# Altium PCB MainDone1.PcbDoc
Units mm, origin at the board's own origin, x right, y up, seen from the top; angles counter-clockwise.
Board outline 144.45 x 98.58 mm, 2 copper layers (Top Layer, Bottom Layer); 13 components, 21 nets, 218 pads, 0 vias.
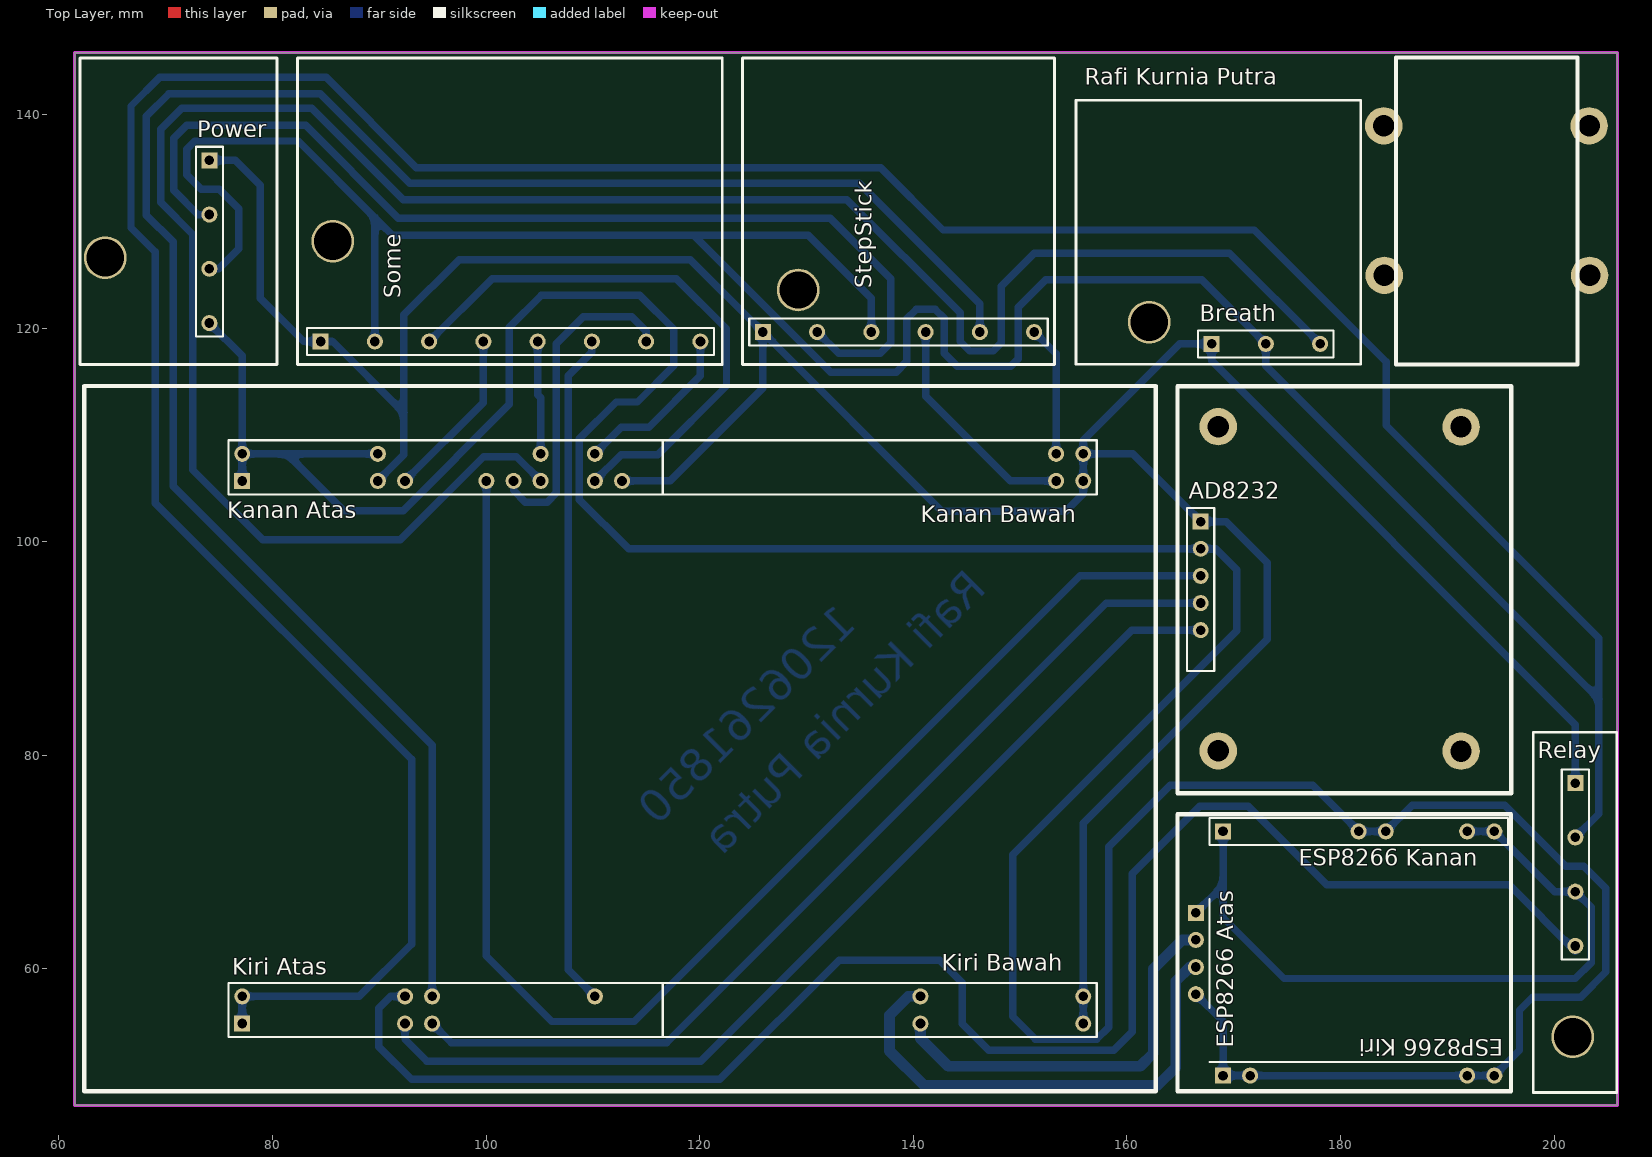
[diagram p0: Top Layer view]
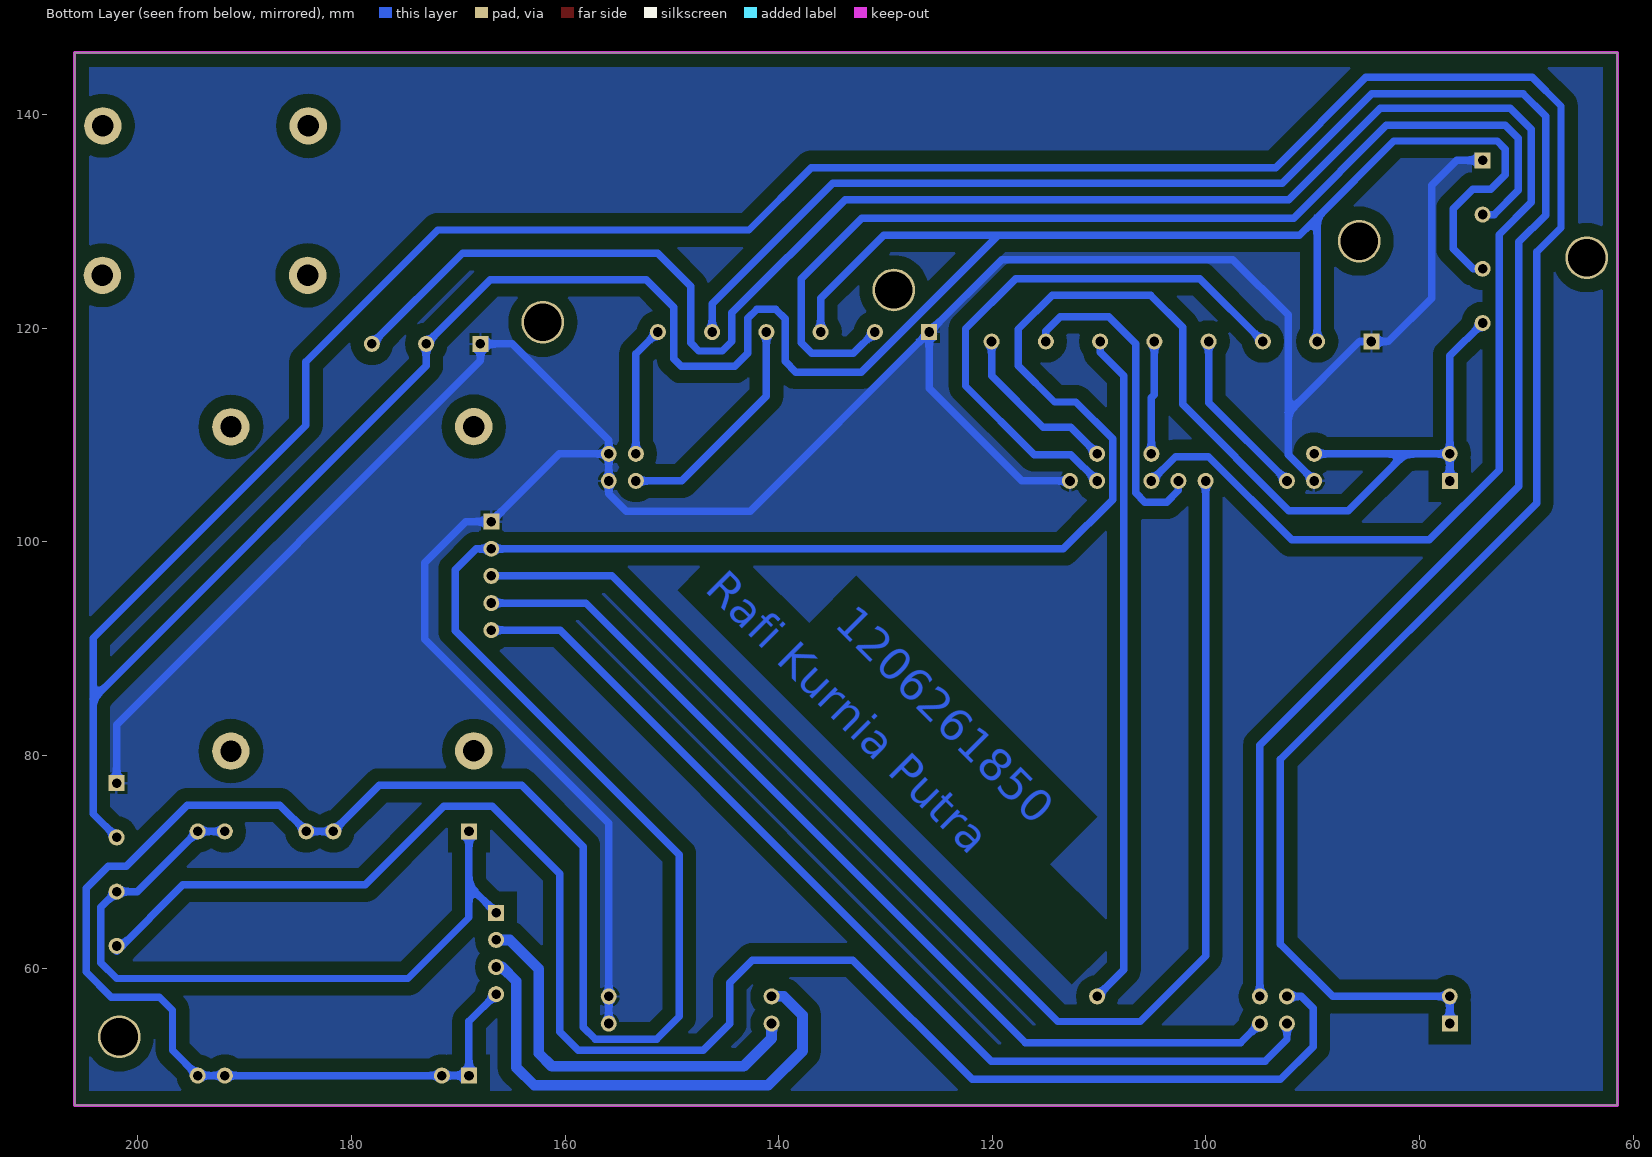
[diagram p1: Bottom Layer view, seen from below]

## Layer stack, top to bottom
Top Solder: solder mask 0.0102, Solder Resist, Dk 3.5
Top Layer: signal copper 0.0356
Dielectric 1: dielectric 0.32, FR-4, Dk 4.8
Bottom Layer: signal copper 0.0356
Bottom Solder: solder mask 0.0102, Solder Resist, Dk 3.5

## Board outline
61.468,47.219 61.468,145.796 205.918,145.796 205.918,47.219

## Design rules (kind name [scope] priority, off if disabled: settings)
Clearance [All] p1: gap=0.35
PolygonConnect [All] p1: connectstyle=Relief reliefconductorwidth=0.254 reliefentries=4 polygonreliefangle="90 Angle" airgapwidth=0.254
RoutingVias [All] p1: holewidth=0.711 width=1.27 viastyle="Through Hole" minholewidth=0.711 minwidth=1.27 maxholewidth=0.711 maxwidth=1.27
SolderMaskExpansion [All] p1: expansion=0.102
Width Width_1 [All] p1: maxlimit=2 minlimit=0.7 preferedwidth=0.7
30 further rules are at their usual default settings.

## Components (designator, comment, footprint, x,y, rotation, side; value= is the part's Value field where it differs from the comment)
AD8232 "" HDR1X6 166.903,101.879 r270 top
Breath "Header 5" HDR1X5 167.919,118.516 r0 top
"ESP8266 Atas" "" HDR1X4 166.451,65.258 r270 top
"ESP8266 Kanan" "" HDR1X11#1 168.991,72.878 r0 top
"ESP8266 Kiri" "" HDR1X11#2 168.991,50.018 r0 top
"Kanan Atas" "" HDR2X16#1 77.165,105.689 r0 top
"Kanan Bawah" "" HDR2X16#2 117.805,105.689 r0 top
"Kiri Atas" "" HDR2X16#3 77.165,54.889 r0 top
"Kiri Bawah" "" HDR2X16#4 117.805,54.889 r0 top
Power "Header 7" HDR1X7 74.092,135.712 r270 top
Relay "Header 7" HDR1X7 201.981,77.394 r270 top
Some "Header 15" HDR1X15 84.506,118.745 r0 top
StepStick "Header 11" HDR1X11#3 125.908,119.634 r0 top

## Footprints (in the part's own frame and the unit in brackets; to place one, negate y for a bottom-side part, rotate by r counter-clockwise, add the part's x,y. Pads: shape width x height; smd on the part's side, far side on the other; paste and mask are expansions set on the pad)
HDR1X4 [mm] "Connector; Header; 4 Position"
  rect 1.5x1.5 hole 0.9: 1(0,0)
  round 1.5 hole 0.9: 2(2.54,0) 3(5.08,0) 4(7.62,0)
  silkscreen extent -1.27,1.27 8.89,1.27
HDR1X5 [mm] "Connector; Header; 5 Position"
  rect 1.5x1.5 hole 0.9: 1(0,0)
  round 0 all layers, no hole: 2(2.54,0) 4(7.62,0)
  round 1.5 hole 0.9: 3(5.08,0) 5(10.16,0)
  silkscreen extent -1.27,-1.27 11.43,1.27
HDR1X6 [mm] "Connector; Header; 6 Position"
  rect 1.5x1.5 hole 0.9: 1(0,0)
  round 1.5 hole 0.9: 2(2.54,0) 3(5.08,0) 4(7.62,0) 5(10.16,0)
  round 0 all layers, no hole: 6(12.7,0)
  silkscreen extent -1.27,-1.27 13.97,1.27
HDR1X7 [mm] "Connector; Header; 7 Position"
  rect 1.5x1.5 hole 0.9: 1(0,0)
  round 0 all layers, no hole: 2(2.54,0) 4(7.62,0) 6(12.7,0)
  round 1.5 hole 0.9: 3(5.08,0) 5(10.16,0) 7(15.24,0)
  silkscreen extent -1.27,-1.27 16.51,1.27
HDR1X11#1 [mm] "Connector; Header; 11 Position"
  rect 1.5x1.5 hole 0.9: 1(0,0)
  round 0 all layers, no hole: 2(2.54,0) 3(5.08,0) 4(7.62,0) 5(10.16,0) 8(17.78,0) 9(20.32,0)
  round 1.5 hole 0.9: 6(12.7,0) 7(15.24,0) 10(22.86,0) 11(25.4,0)
  silkscreen extent -1.27,-1.27 26.67,1.27
HDR1X11#2 [mm] "Connector; Header; 11 Position"
  rect 1.5x1.5 hole 0.9: 1(0,0)
  round 1.5 hole 0.9: 2(2.54,0) 10(22.86,0) 11(25.4,0)
  round 0 all layers, no hole: 3(5.08,0) 4(7.62,0) 5(10.16,0) 6(12.7,0) 7(15.24,0) 8(17.78,0) 9(20.32,0)
  silkscreen extent -1.27,1.27 26.67,1.27
HDR1X11#3 [mm] "Connector; Header; 11 Position"
  rect 1.5x1.5 hole 0.9: 1(0,0)
  round 0 all layers, no hole: 2(2.54,0) 4(7.62,0) 6(12.7,0) 8(17.78,0) 10(22.86,0)
  round 1.5 hole 0.9: 3(5.08,0) 5(10.16,0) 7(15.24,0) 9(20.32,0) 11(25.4,0)
  silkscreen extent -1.27,-1.27 26.67,1.27
HDR1X15 [mm] "Connector; Header; 15 Position"
  rect 1.5x1.5 hole 0.9: 1(0,0)
  round 0 all layers, no hole: 2(2.54,0) 4(7.62,0) 6(12.7,0) 8(17.78,0) 10(22.86,0) 12(27.94,0) 14(33.02,0)
  round 1.5 hole 0.9: 3(5.08,0) 5(10.16,0) 7(15.24,0) 9(20.32,0) 11(25.4,0) 13(30.48,0) 15(35.56,0)
  silkscreen extent -1.27,-1.27 36.83,1.27
HDR2X16#1 [mm] "Connector; Header; 16x2 Position"
  rect 1.5x1.5 hole 0.9: 1(0,0)
  round 1.5 hole 0.9: 2(0,2.54) 11(12.7,0) 12(12.7,2.54) 13(15.24,0) 19(22.86,0) 21(25.4,0) 23(27.94,0) 24(27.94,2.54) 27(33.02,0) 28(33.02,2.54) 29(35.56,0)
  round 0 all layers, no hole: 3(2.54,0) 4(2.54,2.54) 5(5.08,0) 6(5.08,2.54) 7(7.62,0) 8(7.62,2.54) 9(10.16,0) 10(10.16,2.54) 14(15.24,2.54) 15(17.78,0) 16(17.78,2.54) 17(20.32,0) 18(20.32,2.54) 20(22.86,2.54) 22(25.4,2.54) 25(30.48,0) 26(30.48,2.54) 30(35.56,2.54) 31(38.1,0) 32(38.1,2.54)
  silkscreen extent -1.27,-1.27 39.37,3.81
HDR2X16#2 [mm] "Connector; Header; 16x2 Position"
  rect 0x0 all layers, no hole: 1(0,0)
  round 0 all layers, no hole: 2(0,2.54) 3(2.54,0) 4(2.54,2.54) 5(5.08,0) 6(5.08,2.54) 7(7.62,0) 8(7.62,2.54) 9(10.16,0) 10(10.16,2.54) 11(12.7,0) 12(12.7,2.54) 13(15.24,0) 14(15.24,2.54) 15(17.78,0) 16(17.78,2.54) 17(20.32,0) 18(20.32,2.54) 19(22.86,0) 20(22.86,2.54) 21(25.4,0) 22(25.4,2.54) 23(27.94,0) 24(27.94,2.54) 25(30.48,0) 26(30.48,2.54) 27(33.02,0) 28(33.02,2.54)
  round 1.5 hole 0.9: 29(35.56,0) 30(35.56,2.54) 31(38.1,0) 32(38.1,2.54)
  silkscreen extent -1.27,-1.27 39.37,3.81
HDR2X16#3 [mm] "Connector; Header; 16x2 Position"
  rect 1.5x1.5 hole 0.9: 1(0,0)
  round 1.5 hole 0.9: 2(0,2.54) 13(15.24,0) 14(15.24,2.54) 15(17.78,0) 16(17.78,2.54) 28(33.02,2.54)
  round 0 all layers, no hole: 3(2.54,0) 4(2.54,2.54) 5(5.08,0) 6(5.08,2.54) 7(7.62,0) 8(7.62,2.54) 9(10.16,0) 10(10.16,2.54) 11(12.7,0) 12(12.7,2.54) 17(20.32,0) 18(20.32,2.54) 19(22.86,0) 20(22.86,2.54) 21(25.4,0) 22(25.4,2.54) 23(27.94,0) 24(27.94,2.54) 25(30.48,0) 26(30.48,2.54) 27(33.02,0) 29(35.56,0) 30(35.56,2.54) 31(38.1,0) 32(38.1,2.54)
  silkscreen extent -1.27,-1.27 39.37,3.81
HDR2X16#4 [mm] "Connector; Header; 16x2 Position"
  rect 0x0 all layers, no hole: 1(0,0)
  round 0 all layers, no hole: 2(0,2.54) 3(2.54,0) 4(2.54,2.54) 5(5.08,0) 6(5.08,2.54) 7(7.62,0) 8(7.62,2.54) 9(10.16,0) 10(10.16,2.54) 11(12.7,0) 12(12.7,2.54) 13(15.24,0) 14(15.24,2.54) 15(17.78,0) 16(17.78,2.54) 17(20.32,0) 18(20.32,2.54) 21(25.4,0) 22(25.4,2.54) 23(27.94,0) 24(27.94,2.54) 25(30.48,0) 26(30.48,2.54) 27(33.02,0) 28(33.02,2.54) 29(35.56,0) 30(35.56,2.54)
  round 1.5 hole 0.9: 19(22.86,0) 20(22.86,2.54) 31(38.1,0) 32(38.1,2.54)
  silkscreen extent -1.27,-1.27 39.37,3.81

## Part data
AD8232: library part "Header 6", "Header, 6-Pin"
Breath: "Header, 5-Pin"
"ESP8266 Atas": library part "Header 4", "Header, 4-Pin"
"ESP8266 Kanan" "ESP8266 Kiri": library part "Header 11", "Header, 11-Pin"
"Kanan Atas" "Kanan Bawah" "Kiri Atas" "Kiri Bawah": library part "Header 16X2", "Header, 16-Pin, Dual row"
Power Relay: "Header, 7-Pin"
Some: "Header, 15-Pin"
StepStick: "Header, 11-Pin"

## Free pads (board coordinates)
  round 3.5 hole 2: 0(184.038,138.934) 1(203.263,138.935) 2(203.314,124.939) 3(184.089,124.939) 6(191.278,80.395) 7(168.545,80.42) 8(168.545,110.773) 9(191.278,110.748)
  round 4 hole 3.5: 8(64.338,126.594) 8(162.077,120.548) 10(85.649,128.143) 10(129.21,123.571) 10(201.727,53.645)

## Nets (pads, with @x,y where several pads share a name; then routed paths per layer and width w, separated by ;. In a path a pad name is that pad's centre, name@x,y a point inside that pad or via, vN(x,y) a via of type N, cw(c..) or ccw(c..) an arc to the next point about the centre after c; other vN are vias at no path point)
+3.3: "ESP8266 Atas.4" "ESP8266 Kanan.6" "ESP8266 Kanan.7" "ESP8266 Kiri.1" "ESP8266 Kiri.2" "ESP8266 Kiri.10" "ESP8266 Kiri.11" "Kanan Atas.1" "Kanan Atas.2" "Kanan Atas.12" AD8232.2 Power.7 | length 357.4
  Bottom Layer w0.7: Power.7 77.165,117.399 77.165,108.229 ; 77.165,105.689 77.165,108.229 ; 81.331,108.229 86.665,102.895 92.227,102.895 102.184,112.852 102.184,120.091 105.181,123.088 114.376,123.088 117.551,119.913 117.551,116.459 114.173,113.081 112.166,113.081 108.735,109.65 108.735,103.939 113.335,99.339 AD8232.2 168.326,99.339 170.282,97.384 170.282,91.669 149.301,70.688 149.301,55.55 151.412,53.439 157.173,53.439 158.293,54.559 158.293,71.45 164.033,77.191 177.378,77.191 181.691,72.878 184.231,72.878 186.69,75.336 195.351,75.336 201.092,69.596 202.768,69.596 204.826,67.539 204.826,59.715 202.463,57.353 197.968,57.353 196.748,56.134 196.748,52.375 194.391,50.018 191.851,50.018 171.531,50.018 168.991,50.018 168.991,55.098 166.451,57.638 ; 89.865,108.229 77.165,108.229
+5: "Kiri Atas.1" "Kiri Atas.2" Breath.3 Power.5 Relay.3 Some.3 StepStick.5 | length 516.8
  Bottom Layer w0.7: Power.5 74.955,125.552 76.835,127.432 76.835,131.166 75.006,132.994 73.33,132.994 71.958,134.366 71.958,136.754 72.72,137.516 82.419,137.516 89.586,130.349 ; 77.165,54.889 77.165,57.429 88.138,57.429 93.015,62.306 93.015,79.629 69.037,103.607 69.037,127.127 66.751,129.413 66.751,140.792 69.444,143.485 85.014,143.485 93.472,135.026 136.931,135.026 142.773,129.184 171.907,129.184 184.252,116.84 184.252,110.896 204.191,90.957 204.191,74.524 Relay.3 ; Some.3 89.586,130.349 ; 119.494,128.664 132.283,115.875 138.379,115.875 139.395,116.891 139.395,120.879 140.259,121.742 142.062,121.742 142.875,120.929 142.875,117.653 144.094,116.434 149.123,116.434 149.835,117.145 149.835,121.971 152.4,124.536 166.98,124.536 Breath.3 172.999,116.459 204.191,85.268 ; StepStick.5 136.068,122.784 130.15,128.702 91.233,128.702 89.586,130.349
+7.4: Power.3 StepStick.3 | length 96.9
  Bottom Layer w0.7: Power.3 73,130.632 70.739,132.893 70.739,137.77 71.958,138.989 83.099,138.989 91.786,130.302 132.207,130.302 137.897,124.612 137.897,118.643 136.881,117.627 132.994,117.627 StepStick.3
GND: "Kanan Atas.11" "Kanan Atas.29" "Kanan Bawah.31" "Kanan Bawah.32" "Kiri Bawah.31" "Kiri Bawah.32" AD8232.1 Breath.1 Power.1 Relay.1 Some.1 StepStick.1 | length 296.7
  Bottom Layer w0.7: Power.1 76.53,135.712 78.867,133.375 78.867,122.784 82.906,118.745 Some.1 85.623,118.745 92.304,112.065 ; 89.865,105.689 92.304,108.128 92.304,121.245 97.474,126.416 119.126,126.416 StepStick.1 ; 112.725,105.689 117.246,105.689 125.908,114.351 StepStick.1 ; 155.905,54.889 155.905,57.429 155.905,73.66 173.126,90.881 173.126,98.044 169.291,101.879 AD8232.1 160.553,108.229 155.905,108.229 ; Relay.1 201.981,82.88 167.919,116.942 Breath.1 164.922,118.516 155.905,109.499 155.905,108.229 ; StepStick.1 142.672,102.87 154.28,102.87 155.905,104.496 155.905,105.689 155.905,108.229
NetAD8232_3: "Kanan Atas.19" AD8232.3 | length 131.2
  Bottom Layer w0.7: 100.025,105.689 100.025,61.214 106.16,55.079 113.88,55.079 155.6,96.799 AD8232.3
NetAD8232_4: "Kiri Atas.15" AD8232.4 | length 89.7
  Bottom Layer w0.7: 94.945,54.889 96.723,53.111 116.891,53.111 158.039,94.259 AD8232.4
NetAD8232_5: "Kiri Atas.13" AD8232.5 | length 93.5
  Bottom Layer w0.7: 92.405,54.889 92.405,53.416 94.463,51.359 120.091,51.359 160.452,91.719 AD8232.5
NetBreath_5: "Kanan Atas.23" Breath.5 | length 203.4
  Bottom Layer w0.7: 105.105,105.689 102.819,107.975 99.771,107.975 91.973,100.178 79.07,100.178 72.534,106.714 72.534,128.761 69.52,131.775 69.52,138.608 71.501,140.589 83.668,140.589 92.227,132.029 133.782,132.029 144.374,121.437 144.374,118.745 145.263,117.856 147.472,117.856 148.234,118.618 148.234,123.927 151.308,127 169.596,127 Breath.5
"NetESP8266 Atas_1": "ESP8266 Atas.1" "ESP8266 Kanan.1" "ESP8266 Kanan.10" "ESP8266 Kanan.11" Relay.5 | length 73.9
  Bottom Layer w0.7: 166.451,65.258 168.991,67.798 168.991,72.878 168.991,64.816 174.701,59.106 201.981,59.106 203.454,60.579 203.454,65.761 Relay.5 200.035,67.234 194.391,72.878 191.851,72.878
"NetESP8266 Atas_2": "ESP8266 Atas.2" "Kiri Bawah.19" | length 37.8
  Bottom Layer w1: 140.665,54.889 140.665,53.492 143.281,50.876 161.216,50.876 162.458,52.119 162.458,59.995 165.181,62.718 166.451,62.718
"NetESP8266 Atas_3": "ESP8266 Atas.3" "Kiri Bawah.20" | length 46.3
  Bottom Layer w1: 140.665,57.429 139.522,57.429 137.77,55.677 137.77,52.324 140.995,49.098 162.89,49.098 164.567,50.775 164.567,58.852 165.892,60.178 166.451,60.178
"NetKanan Atas_13": "Kanan Atas.13" Some.7 | length 16.1
  Bottom Layer w0.7: 92.405,105.689 99.746,113.03 Some.7
"NetKanan Atas_21": "Kanan Atas.21" Some.13 | length 30.6
  Bottom Layer w0.7: 102.565,105.689 102.565,104.8 103.657,103.708 105.715,103.708 106.578,104.572 106.578,118.542 109.093,121.056 113.614,121.056 114.986,119.685 Some.13
"NetKanan Atas_24": "Kanan Atas.24" Some.9 | length 10.6
  Bottom Layer w0.7: Some.9 104.826,113.767 105.105,113.487 105.105,108.229
"NetKanan Atas_27": "Kanan Atas.27" Some.5 | length 53.6
  Bottom Layer w0.7: Some.5 100.559,124.638 117.805,124.638 122.504,119.939 122.504,114.579 116.078,108.153 112.649,108.153 110.185,105.689
"NetKanan Atas_28": "Kanan Atas.28" Some.15 | length 16.1
  Bottom Layer w0.7: 110.185,108.229 112.655,110.7 115.246,110.7 120.066,115.519 Some.15
"NetKanan Bawah_29": "Kanan Bawah.29" StepStick.7 | length 21.5
  Bottom Layer w0.7: StepStick.7 141.148,113.614 149.073,105.689 153.365,105.689
"NetKanan Bawah_30": "Kanan Bawah.30" StepStick.11 | length 12.3
  Bottom Layer w0.7: StepStick.11 153.365,117.577 153.365,108.229
"NetKiri Atas_14": "Kiri Atas.14" Relay.7 | length 154
  Bottom Layer w0.7: 92.405,57.429 91.059,57.429 89.941,56.312 89.941,52.73 93.015,49.657 121.869,49.657 133.045,60.833 142.469,60.833 144.583,58.718 144.583,54.858 147.051,52.389 158.765,52.389 160.477,54.102 160.477,68.91 166.802,75.235 171.348,75.235 178.714,67.869 195.783,67.869 Relay.7@201.981,61.671
"NetKiri Atas_16": "Kiri Atas.16" StepStick.9 | length 183.2
  Bottom Layer w0.7: 94.945,57.429 94.945,80.95 70.688,105.207 70.688,128.067 68.174,130.581 68.174,139.827 70.307,141.961 84.48,141.961 92.862,133.579 134.925,133.579 146.228,122.276 StepStick.9
"NetKiri Atas_28": "Kiri Atas.28" Some.11 | length 63.3
  Bottom Layer w0.7: Some.11 109.906,117.754 107.671,115.519 107.671,59.944 110.185,57.429
pads on no net: "ESP8266 Kanan.2" "ESP8266 Kanan.3" "ESP8266 Kanan.4" "ESP8266 Kanan.5" "ESP8266 Kanan.8" "ESP8266 Kanan.9" "ESP8266 Kiri.3" "ESP8266 Kiri.4" "ESP8266 Kiri.5" "ESP8266 Kiri.6" "ESP8266 Kiri.7" "ESP8266 Kiri.8" "ESP8266 Kiri.9" "Kanan Atas.3" "Kanan Atas.4" "Kanan Atas.5" "Kanan Atas.6" "Kanan Atas.7" "Kanan Atas.8" "Kanan Atas.9" "Kanan Atas.10" "Kanan Atas.14" "Kanan Atas.15" "Kanan Atas.16" "Kanan Atas.17" "Kanan Atas.18" "Kanan Atas.20" "Kanan Atas.22" "Kanan Atas.25" "Kanan Atas.26" "Kanan Atas.30" "Kanan Atas.31" "Kanan Atas.32" "Kanan Bawah.1" "Kanan Bawah.2" "Kanan Bawah.3" "Kanan Bawah.4" "Kanan Bawah.5" "Kanan Bawah.6" "Kanan Bawah.7" "Kanan Bawah.8" "Kanan Bawah.9" "Kanan Bawah.10" "Kanan Bawah.11" "Kanan Bawah.12" "Kanan Bawah.13" "Kanan Bawah.14" "Kanan Bawah.15" "Kanan Bawah.16" "Kanan Bawah.17" "Kanan Bawah.18" "Kanan Bawah.19" "Kanan Bawah.20" "Kanan Bawah.21" "Kanan Bawah.22" "Kanan Bawah.23" "Kanan Bawah.24" "Kanan Bawah.25" "Kanan Bawah.26" "Kanan Bawah.27" "Kanan Bawah.28" "Kiri Atas.3" "Kiri Atas.4" "Kiri Atas.5" "Kiri Atas.6" "Kiri Atas.7" "Kiri Atas.8" "Kiri Atas.9" "Kiri Atas.10" "Kiri Atas.11" "Kiri Atas.12" "Kiri Atas.17" "Kiri Atas.18" "Kiri Atas.19" "Kiri Atas.20" "Kiri Atas.21" "Kiri Atas.22" "Kiri Atas.23" "Kiri Atas.24" "Kiri Atas.25" "Kiri Atas.26" "Kiri Atas.27" "Kiri Atas.29" "Kiri Atas.30" "Kiri Atas.31" "Kiri Atas.32" "Kiri Bawah.1" "Kiri Bawah.2" "Kiri Bawah.3" "Kiri Bawah.4" "Kiri Bawah.5" "Kiri Bawah.6" "Kiri Bawah.7" "Kiri Bawah.8" "Kiri Bawah.9" "Kiri Bawah.10" "Kiri Bawah.11" "Kiri Bawah.12" "Kiri Bawah.13" "Kiri Bawah.14" "Kiri Bawah.15" "Kiri Bawah.16" "Kiri Bawah.17" "Kiri Bawah.18" "Kiri Bawah.21" "Kiri Bawah.22" "Kiri Bawah.23" "Kiri Bawah.24" "Kiri Bawah.25" "Kiri Bawah.26" "Kiri Bawah.27" "Kiri Bawah.28" "Kiri Bawah.29" "Kiri Bawah.30" AD8232.6 Breath.2 Breath.4 Power.2 Power.4 Power.6 Relay.2 Relay.4 Relay.6 Some.2 Some.4 Some.6 Some.8 Some.10 Some.12 Some.14 StepStick.2 StepStick.4 StepStick.6 StepStick.8 StepStick.10

## Polygon pours and split planes (outlines as drawn)
GND on Bottom Layer "Bottom Layer-GND" (solid, pour order 4): 61.468,145.796 61.468,47.219 205.918,47.219 205.918,145.796

## Keep-outs
Keep-Out Layer:
  the board outline again, w0.254

## Other copper
Bottom Layer:
  text "Rafi Kurnia Putra" at 147.015,95.479 h3.05 r45
  text "1206261850" at 134.874,92.202 h3.05 r45

## Silkscreen, mask and mechanical layers (free items; w line width, h text height)
Top Overlay:
  lines w0.254: 61.976,116.586 80.416,116.586 80.416,145.288 61.976,145.288 61.976,116.586 ; 82.347,116.586 82.347,145.288 122.098,145.288 122.098,116.586 82.347,116.586 ; 124.003,116.586 124.003,145.288 153.213,145.288 153.213,116.586 124.003,116.586 ; 155.219,116.611 181.889,116.611 181.889,141.337 155.219,141.337 155.219,116.611 ; 198.044,48.438 198.044,82.168 205.867,82.168 205.867,48.438 198.044,48.438
  lines w0.4: 62.382,48.539 162.687,48.539 162.687,114.579 62.382,114.579 62.382,48.539 ; 164.719,48.539 164.719,74.473 195.961,74.473 195.961,48.539 164.719,48.539 ; 164.728,76.461 164.728,114.561 195.97,114.561 195.97,76.461 164.728,76.461 ; 185.187,116.595 202.187,116.595 202.187,145.339 185.187,145.339 185.187,116.595
  text "Rafi Kurnia Putra" at 156.058,142.773 h1.52